# Allegro board pcb.brd
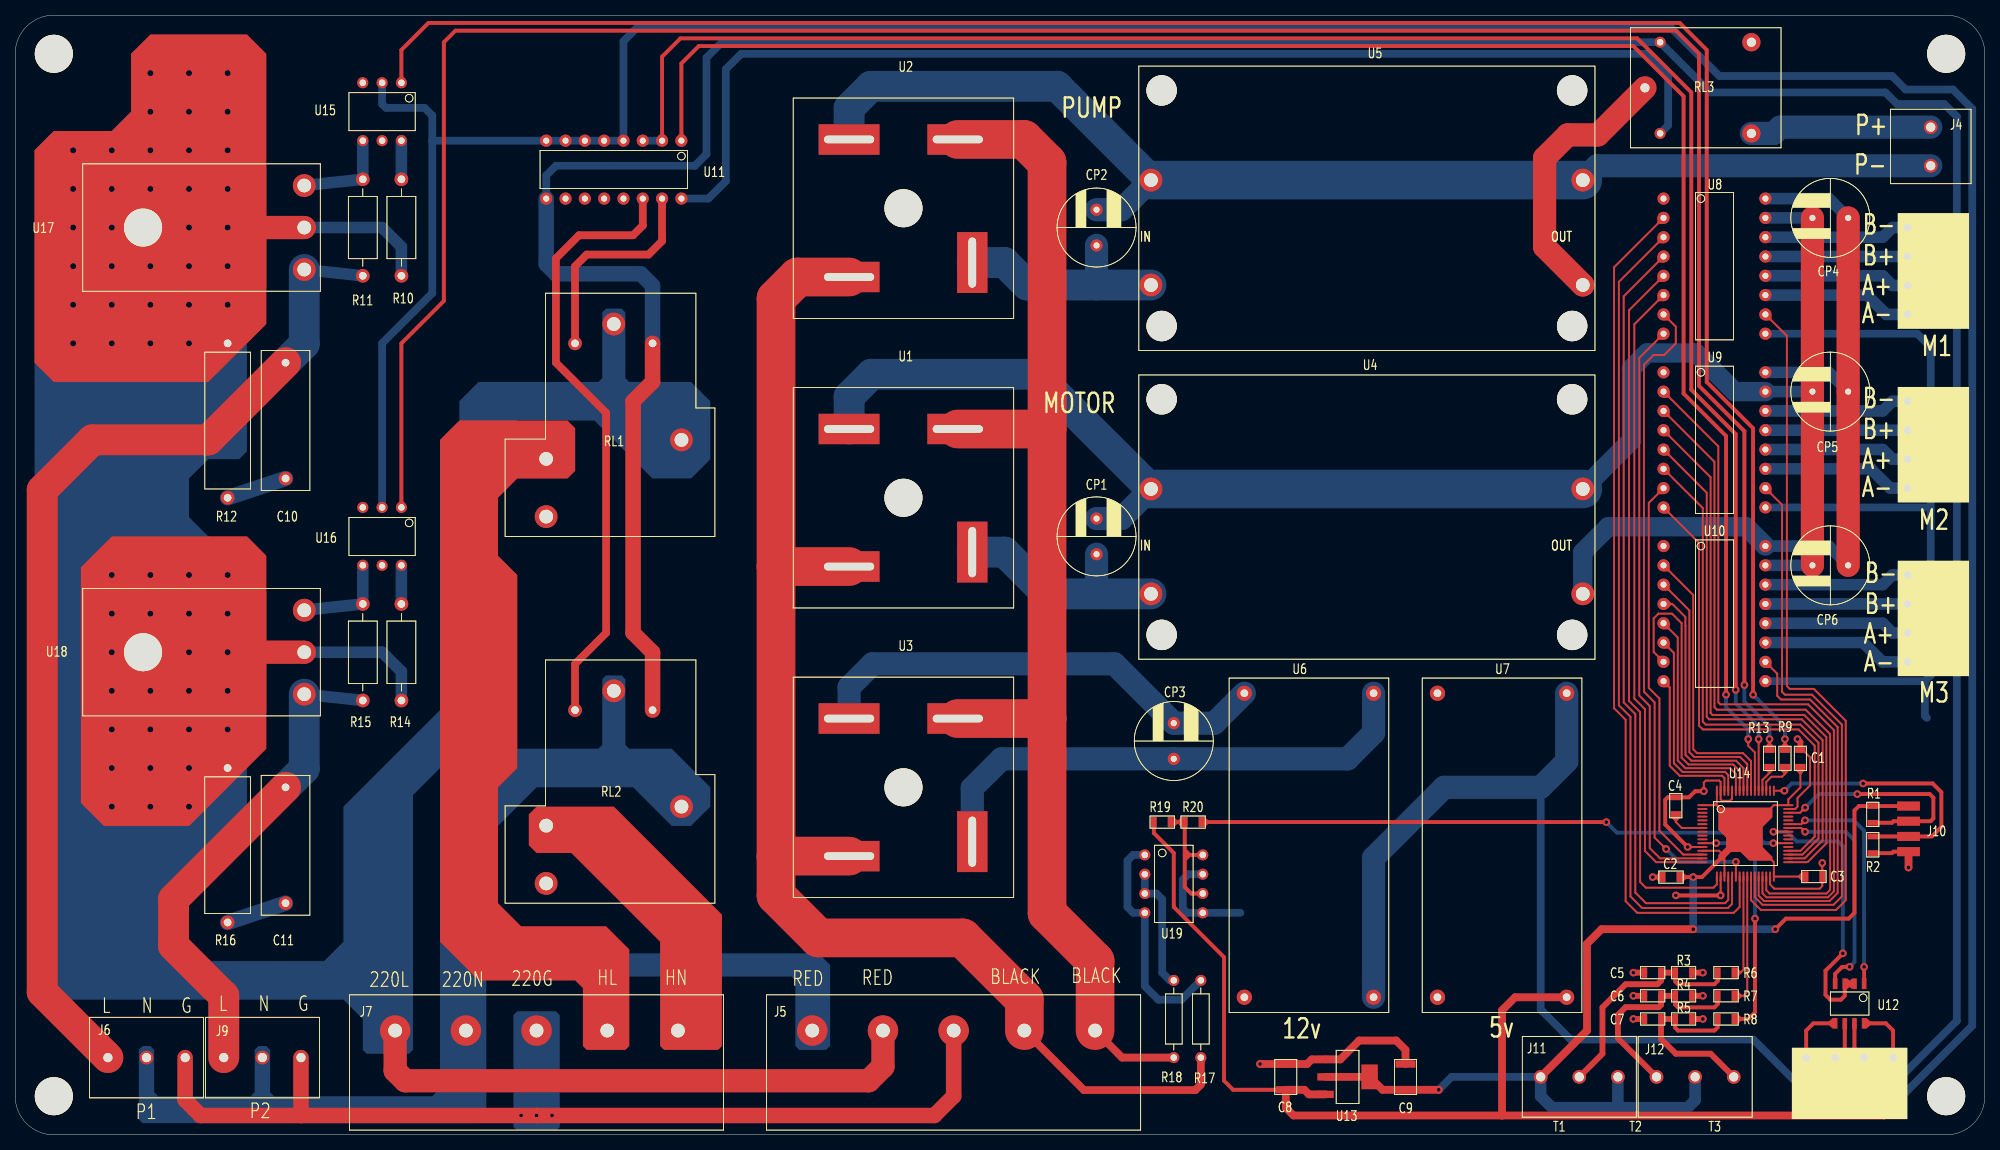
[diagram p0: board, top side]
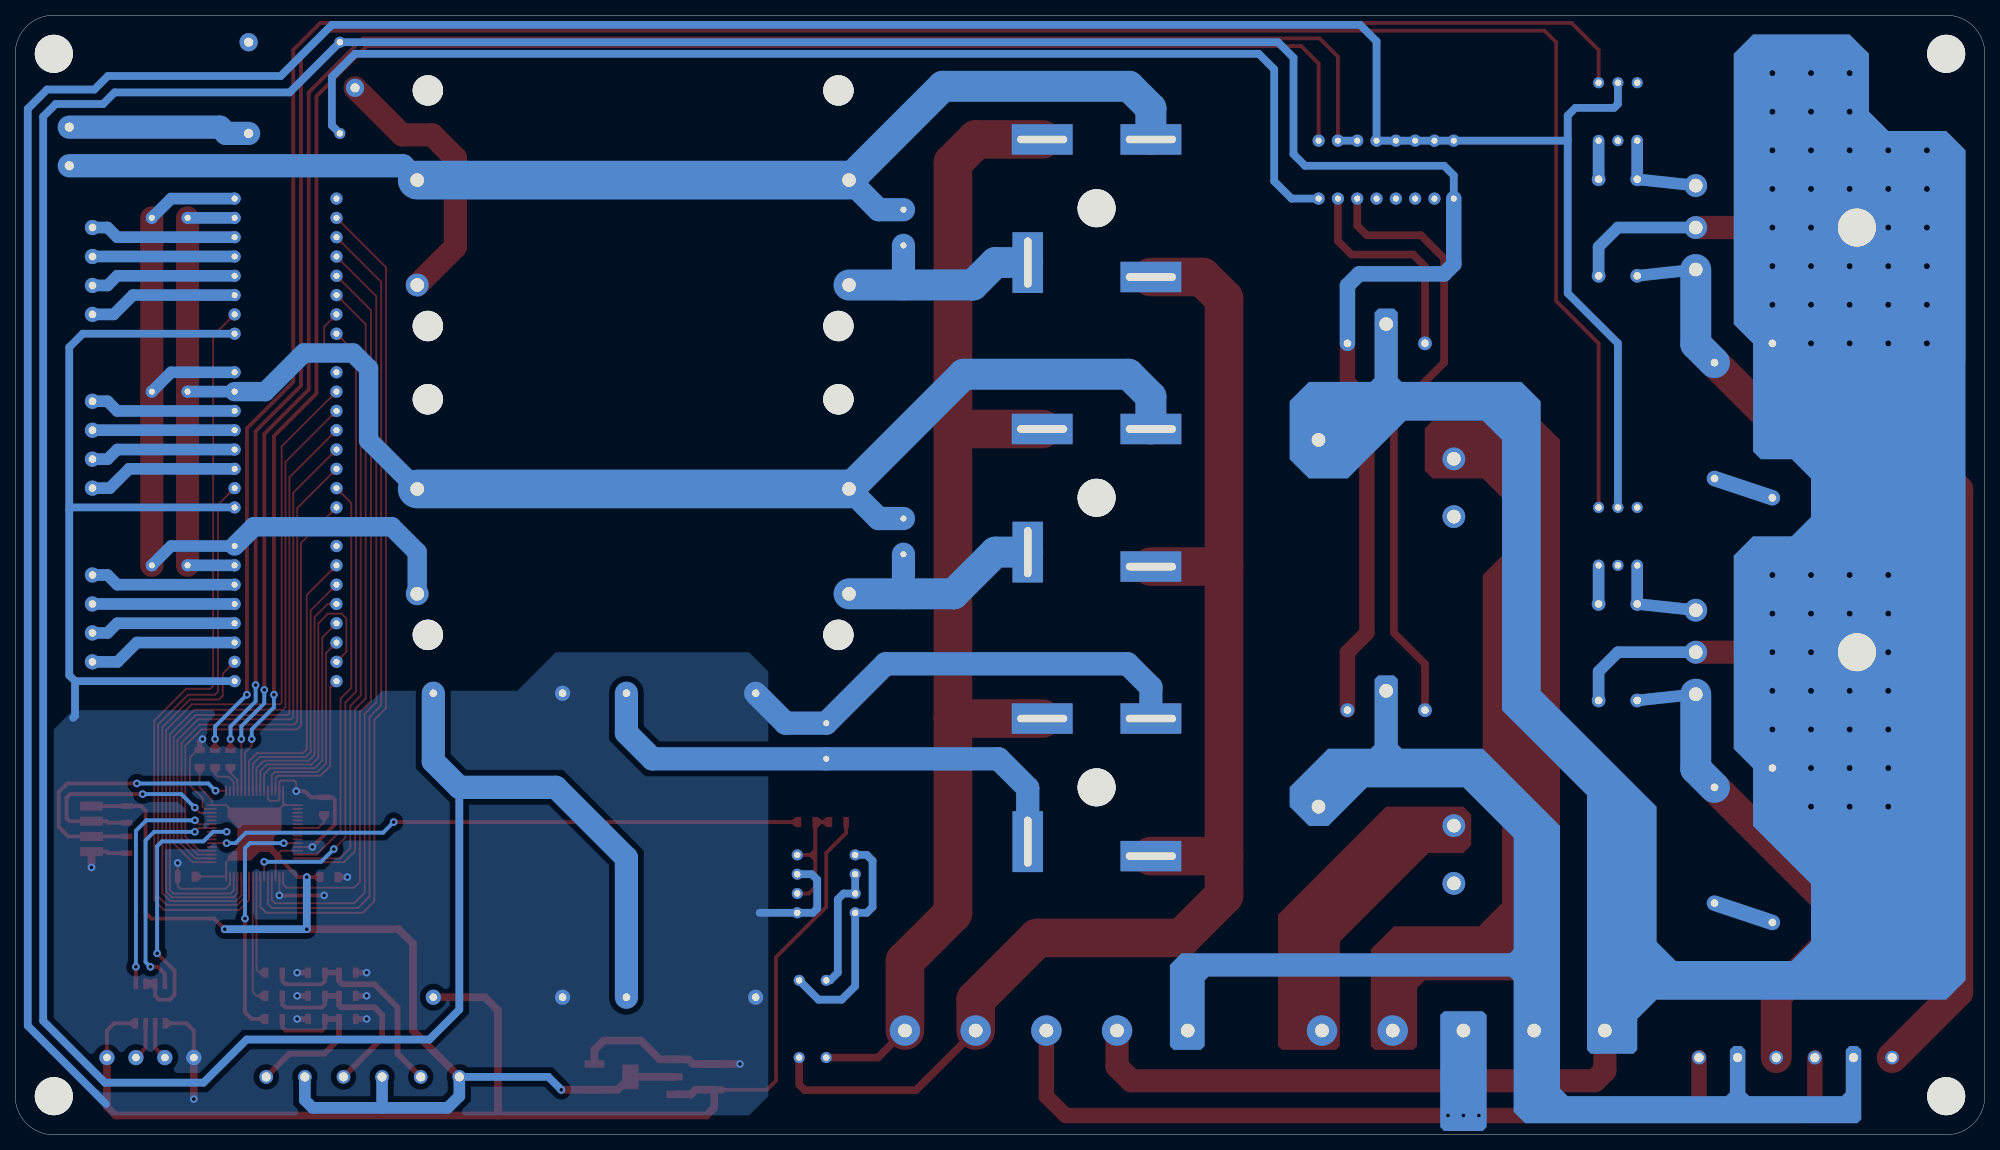
[diagram p1: board, bottom side, seen from below]

Outline 259.08 x 147.32 mm; copper layers: TOP, BOTTOM. Coordinates in mm from the lower left corner of the outline.
Outline path: 0,142.24 0,5.08 arc(1.49,1.49) 5.08,0 254,0 arc(257.59,1.49) 259.08,5.08 259.08,142.24 arc(257.59,145.83) 254,147.32 5.08,147.32 arc(1.49,145.83) 0,142.24

## Placement (name value [footprint] x y rotation side)
C1  100n  [C0805L]  234.82 49.53 270 top
C2  100n  [C0805L]  217.81 33.91 0 top
C3  100n  [C0805L]  236.6 33.98 0 top
C4  100n  [C0805L]  218.44 43.31 270 top
C5  100n  [C0805L]  215.39 21.34 0 top
C6  100n  [C0805L]  215.39 18.29 0 top
C7  100n  [C0805L]  215.39 15.24 0 top
C8  47u  [C1210L]  167.13 7.62 270 top
C9  47u  [C1210L]  182.88 7.62 270 top
C10  0.01u  [CAPAD1524]  35.56 93.98 270 top
C11  0.01u  [CAPAD1524]  35.56 38.1 270 top
CP1  470u/50v  [CAPPRD1020]  142.24 78.74 90 top
CP2  470u/50v  [CAPPRD1020]  142.24 119.38 90 top
CP3  470u/50v  [CAPPRD1020]  152.4 51.82 90 top
CP4  470u/50v  [CAPPRD1020]  238.76 120.65 180 top
CP5  470u/50v  [CAPPRD1020]  238.76 97.79 180 top
CP6  470u/50v  [CAPPRD1020]  238.76 74.93 180 top
J1  CON4  [CON381P_4W]  248.92 113.66 90 top
J2  CON4  [CON381P_4W]  248.92 90.8 90 top
J3  CON4  [CON381P_4W]  248.92 67.94 90 top
J4  CON2  [CON508P_2]  251.97 130.05 270 top
J5  CON5  [CON930P_5]  123.44 13.72 0 top
J6  CON3  [CON508P_3]  17.27 10.16 0 top
J7  CON5  [CON930P_5]  68.58 13.72 0 top
J8  485  [CON381P_4W]  241.3 10.16 0 top
J9  CON3  [CON508P_3]  32.51 10.16 0 top
J10  CON4  [PH200H_4]  249.05 40.26 270 top
J11  CON3  [CON508P_3]  205.74 7.62 0 top
J12  CON3  [CON508P_3]  220.98 7.62 0 top
NOREF  -  [unnamed]  5.08 142.24 0 top
NOREF#2  -  [unnamed]  254 5.08 0 top
NOREF#3  -  [unnamed]  5.08 5.08 0 top
NOREF#4  -  [unnamed]  254 142.24 0 top
R1  1002  [R0805L]  244.35 42.16 270 top
R2  1002  [R0805L]  244.35 38.16 90 top
R3  1002  [R0805L]  219.46 21.34 0 top
R4  1002  [R0805L]  219.46 18.29 0 top
R5  1002  [R0805L]  219.46 15.24 0 top
R6  101  [R0805L]  225.04 21.34 180 top
R7  101  [R0805L]  225.04 18.29 180 top
R8  101  [R0805L]  225.04 15.24 180 top
R9  301  [R0805L]  232.79 49.53 270 top
R10  100  [RESAD1270]  50.8 119.38 90 top
R11  10k  [RESAD1270]  45.72 119.38 90 top
R12  39  [RESAD2032]  27.94 93.98 270 top
R13  301  [R0805L]  230.76 49.53 270 top
R14  100  [RESAD1270]  50.8 63.5 90 top
R15  10k  [RESAD1270]  45.72 63.5 90 top
R16  39  [RESAD2032]  27.94 38.1 270 top
R17  5.6k  [RESAD1016]  155.96 15.24 90 top
R18  5.6k  [RESAD1016]  152.4 15.24 90 top
R19  472  [R0805L]  150.88 41.15 0 top
R20  102  [R0805L]  154.94 41.15 180 top
RL1  RELAY30  [RELAY30A]  78.74 104.14 180 top
RL2  RELAY30  [RELAY30A]  78.74 55.88 180 top
RL3  RELAY10  [RELAY10A]  214.38 137.76 0 top
U1  KBPC2510  [KBPCXX10]  116.84 83.82 0 top
U2  KBPC2510  [KBPCXX10]  116.84 121.92 0 top
U3  KBPC2510  [KBPCXX10]  116.84 45.72 0 top
U4  DC/DC/12  [DCDC60X38]  177.8 81.28 0 top
U5  DC/DC/12  [DCDC60X38]  177.8 121.92 0 top
U6  DC/DC/12  [DCDC44X21]  170.18 38.1 270 top
U7  DC/DC/12  [DCDC44X21]  195.58 38.1 270 top
U8  MDRV8825  [DIP254P1340_16]  223.52 114.3 0 top
U9  MDRV8825  [DIP254P1340_16]  223.52 91.44 0 top
U10  MDRV8825  [DIP254P1340_16]  223.52 68.58 0 top
U11  ULN2003  [DIP254P762_16]  78.74 127 270 top
U12  SN184  [SOIC8]  241.3 17.27 270 top
U13  LDO1117  [SOT223]  175.26 7.62 0 top
U14  STM32F103RX  [LQFP64]  227.58 39.62 0 top
U15  MOC3052  [DIP254P762_6]  48.26 134.62 270 top
U16  MOC3052  [DIP254P762_6]  48.26 78.74 270 top
U17  TRIAC  [BTA41]  33.02 119.38 90 top
U18  TRIAC  [BTA41]  33.02 63.5 90 top
U19  TLP521-2  [DIP254P762_8]  152.4 33.02 0 top

## Library data of the parts
C1-C11 = C
CP1-CP6 = CP
J1-J3 J8 J10 U4-U7 = CON4
J4 = CON2
J5 J7 = CON5
J6 J9 J11 J12 = CON3
R1-R20 = R
RL1 RL2 = RELAY3
RL3 = RELAY
U1-U3 = RECTBG
U8-U10 = MDRV8825
U11 = ULN2003
U12 = SN184
U13 = LDO1117
U14 = STM32F103RX
U15 U16 = MOC3083
U17 U18 = TRIAC-B
U19 = TLP521-2

## Footprints (pads in the part's own frame, mm; a bottom-side part is the same pattern mirrored in y, then rotated)
BTA41
  round 5.001 hole 5.001 unplated: (0,16.2)
  round 3 hole 1.801: 1(-5.524,-5.001) 2(0,-5.001) 3(5.524,-5.001)
  rect 15.999x24 smd: 4(0,11.999)
C0805L
  rect 0.749x1.349 smd: 1(-1.1,0) 2(1.1,0)
C1210L
  rect 0.95x2.601 smd: 1(-1.699,0) 2(1.699,0)
CAPAD1524
  round 1.801 hole 1.001: 1(-7.62,0) 2(7.62,0)
CAPPRD1020
  round 1.6 hole 0.8: 1(-2.349,0) 2(2.349,0)
CON381P_4W
  round 1.999 hole 1.001: 1(-5.715,0) 2(-1.905,0) 3(1.905,0) 4(5.715,0)
CON508P_2
  round 1.801 hole 1.199: 1(-2.54,0) 2(2.54,0)
CON508P_3
  round 1.801 hole 1.199: 1(-5.08,0) 2(0,0) 3(5.08,0)
CON930P_5
  round 4 hole 1.801: 1(-18.6,0) 2(-9.299,0) 3(0,0) 4(9.299,0) 5(18.6,0)
DCDC44X21
  round 1.999 hole 1.001: 1(-20,8.499) 2(-20,-8.499) 3(20,8.499) 4(20,-8.499)
DCDC60X38
  round 4 hole 4 unplated: (-27,15.499) (-27,-15.499) (27,15.499) (27,-15.499)
  round 3 hole 1.801: 1(-28.4,-10.099) 2(-28.4,3.701) 3(28.4,-10.099) 4(28.4,3.701)
DIP254P762_6
  round 1.45 hole 0.851: 1(-3.81,2.54) 2(-3.81,0) 3(-3.81,-2.54) 4(3.81,-2.54) 5(3.81,0) 6(3.81,2.54)
DIP254P762_8
  round 1.45 hole 0.851: 1(-3.81,3.81) 2(-3.81,1.27) 3(-3.81,-1.27) 4(-3.81,-3.81) 5(3.81,-3.81) 6(3.81,-1.27) 7(3.81,1.27) 8(3.81,3.81)
DIP254P762_16
  round 1.6 hole 0.8: 1(-3.81,8.89) 2(-3.81,6.35) 3(-3.81,3.81) 4(-3.81,1.27) 5(-3.81,-1.27) 6(-3.81,-3.81) 7(-3.81,-6.35) 8(-3.81,-8.89) 9(3.81,-8.89) 10(3.81,-6.35) 11(3.81,-3.81) 12(3.81,-1.27) 13(3.81,1.27) 14(3.81,3.81) 15(3.81,6.35) 16(3.81,8.89)
DIP254P1340_16
  round 1.6 hole 0.8: 1(-6.701,8.89) 2(-6.701,6.35) 3(-6.701,3.81) 4(-6.701,1.27) 5(-6.701,-1.27) 6(-6.701,-3.81) 7(-6.701,-6.35) 8(-6.701,-8.89) 9(6.701,-8.89) 10(6.701,-6.35) 11(6.701,-3.81) 12(6.701,-1.27) 13(6.701,1.27) 14(6.701,3.81) 15(6.701,6.35) 16(6.701,8.89)
KBPCXX10
  round 5.001 hole 5.001 unplated: (0,0)
  rect 4x8.001 hole 1.001x6.599: 1(9.05,-7.15)
  rect 8.001x4 hole 6.599x1.001: 2(-7.15,-9.05) 3(-7.15,9.05) 4(7.15,9.05)
LQFP64
  oval 1.349x0.249 smd: 1(-5.649,3.749) 2(-5.649,3.251) 3(-5.649,2.751) 4(-5.649,2.25) 5(-5.649,1.75) 6(-5.649,1.25) 7(-5.649,0.749) 8(-5.649,0.249) 9(-5.649,-0.249) 10(-5.649,-0.749) 11(-5.649,-1.25) 12(-5.649,-1.75) 13(-5.649,-2.25) 14(-5.649,-2.751) 15(-5.649,-3.251) 16(-5.649,-3.749) 33(5.649,-3.749) 34(5.649,-3.251) 35(5.649,-2.751) 36(5.649,-2.25) 37(5.649,-1.75) 38(5.649,-1.25) 39(5.649,-0.749) 40(5.649,-0.249) 41(5.649,0.249) 42(5.649,0.749) 43(5.649,1.25) 44(5.649,1.75) 45(5.649,2.25) 46(5.649,2.751) 47(5.649,3.251) 48(5.649,3.749)
  oval 0.249x1.349 smd: 17(-3.749,-5.649) 18(-3.251,-5.649) 19(-2.751,-5.649) 20(-2.25,-5.649) 21(-1.75,-5.649) 22(-1.25,-5.649) 23(-0.749,-5.649) 24(-0.249,-5.649) 25(0.249,-5.649) 26(0.749,-5.649) 27(1.25,-5.649) 28(1.75,-5.649) 29(2.25,-5.649) 30(2.751,-5.649) 31(3.251,-5.649) 32(3.749,-5.649) 49(3.749,5.649) 50(3.251,5.649) 51(2.751,5.649) 52(2.25,5.649) 53(1.75,5.649) 54(1.25,5.649) 55(0.749,5.649) 56(0.249,5.649) 57(-0.249,5.649) 58(-0.749,5.649) 59(-1.25,5.649) 60(-1.75,5.649) 61(-2.25,5.649) 62(-2.751,5.649) 63(-3.251,5.649) 64(-3.749,5.649)
PH200H_4
  rect 1.199x3 smd: 1(-3,0) 2(-1.001,0) 3(1.001,0) 4(3,0)
R0805L
  rect 0.749x1.349 smd: 1(-1.1,0) 2(1.1,0)
RELAY10A
  round 1.45 hole 0.851: 1(1.999,5.999) 2(1.999,-5.999)
  round 2.4 hole 1.199: 3(0,0) 4(14,-5.999) 5(14,5.999)
RELAY30A
  round 1.801 hole 1.001: 1(-5.1,0) 2(5.1,0)
  round 3 hole 1.801: 3(-8.9,12.7) 4(8.9,15.199) 5(8.9,22.799) 6(0,-2.54)
RESAD1016
  round 1.45 hole 0.851: 1(-5.08,0) 2(5.08,0)
RESAD1270
  round 1.801 hole 1.001: 1(-6.35,0) 2(6.35,0)
RESAD2032
  round 1.801 hole 1.001: 1(-10.16,0) 2(10.16,0)
SOIC8
  rect 1.4x0.599 smd: 1(-2.601,1.905) 2(-2.601,0.635) 3(-2.601,-0.635) 4(-2.601,-1.905) 5(2.601,-1.905) 6(2.601,-0.635) 7(2.601,0.635) 8(2.601,1.905)
SOT223
  rect 2.149x0.95 smd: 1(-2.901,2.301) 2(-2.901,0) 3(-2.901,-2.301)
  rect 2.149x3.251 smd: 4(2.901,0)
unnamed
  round 5.001 hole 5.001 unplated: (0,0)

## Nets
3V3: C1.2 C2.2 C3.1 C9.2 J10.1 J11.1 J11.3 J12.2 R1.1 U13.2(VO) U13.4(VOP) U14.1(VBAT) U14.13(VDDA) U14.19(VDD_4) U14.32(VDD_1) U14.48(VDD_2) U14.64(VDD_3)
5V: C8.2 J8.4 R19.1 U7.3 U12.8(VCC) U13.3(VI)
12V: RL1.1 RL2.1 RL3.1 U6.3 U7.1 U11.9(COMM)
27V: CP3.1 U3.1(+) U6.1
GND: C1.1 C2.1 C3.2 C4.1 C5.1 C6.1 C7.1 C8.1 C9.1 CP3.2 J8.1 J10.4 R2.1 R3.2 R4.2 R5.2 U3.3(-) U6.2 U6.4 U7.2 U7.4 U8.9(GND) U9.9(GND) U10.9(GND) U11.4(IN4) U11.5(IN5) U11.6(IN6) U11.7(IN7) U11.8(GND) U12.5(GND) U13.1(GND) U14.12(VSSA) U14.18(VSS_4) U14.31(VSS_1) U14.47(VSS_2) U14.60(BOOT0) U14.63(VSS_3) U15.2 U16.2 U19.5(2E) U19.7(1E)
P24V: RL3.3 U5.3
P27V: CP2.1 U2.1(+) U5.1
PGND: CP2.2 J4.2 U2.3(-) U5.2 U5.4
485A: J8.2 U12.6(A)
485B: J8.3 U12.7(B)
485DE: U12.2(R\E\) U12.3(DE) U14.41(PA8/MCO/TIM1_CH1)
AC24L: J5.4 R17.1 U1.2(AC1) U2.2(AC1) U3.2(AC1)
AC24N: J5.5 R18.1 U1.4(AC2) U2.4(AC2) U3.4(AC2)
AC220G: J5.3 J6.3 J7.3 J9.3
AC220L: J5.2 J7.1 R10.1 R12.1 R14.1 R16.1 RL1.3 RL1.6 U17.2 U17.4(TAB) U18.2 U18.4(TAB)
AC220N: J5.1 J6.2 J7.2 J9.2 RL2.3 RL2.6
AT1: R6.1 U14.24(PC4/ADC1_IN14)
AT2: R7.1 U14.25(PC5/ADC1_IN15)
AT3: R8.1 U14.11(PC3/ADC1_IN13)
HEATC: U11.2(IN2) U11.3(IN3) U14.53(PC12)
HEATL: J7.4 RL1.4
HEATN: J7.5 RL2.4
M1A1: J1.2 U8.12(A1)
M1A2: J1.1 U8.11(A2)
M1B1: J1.3 U8.13(B1)
M1B2: J1.4 U8.14(B2)
M1DIR: U8.8(DIR) U14.15(PA1/ADC1_IN1)
M1M0: U8.2(M0) U14.23(PA7/SPI1_MOSI/ADC1_IN7)
M1M1: U8.3(M1) U14.21(PA5/SPI1_SCK/ADC1_IN5)
M1M2: U8.4(M2) U14.20(PA4/SPI1_NSS/ADC1_IN4)
M1NFLT: U8.10(NFAULT) U14.26(PB0/ADC1_IN8)
M1NRST: U8.5(NRST) U14.17(PA3/USART2_RX/ADC1_IN3)
M1NSLP: U8.6(NSLEEP) U14.16(PA2/USART2_TX/ADC1_IN2)
M1STEP: U8.7(STEP) U14.22(PA6/SPI1_MISO/ADC1_IN6)
M2A1: J2.2 U9.12(A1)
M2A2: J2.1 U9.11(A2)
M2B1: J2.3 U9.13(B1)
M2B2: J2.4 U9.14(B2)
M2DIR: U9.8(DIR) U14.36(PB15/TIM1_CH3N)
M2M0: U9.2(M0) U14.29(PB10)
M2M1: U9.3(M1) U14.30(PB11)
M2M2: U9.4(M2) U14.33(PB12/TIM1_BKIN)
M2NFLT: U9.10(NFAULT) U14.27(PB1/ADC1_IN9)
M2NRST: U9.5(NRST) U14.34(PB13/TIM1_CH1N)
M2NSLP: U9.6(NSLEEP) U14.35(PB14/TIM1_CH2N)
M2STEP: U9.7(STEP) U14.14(PA0/WKUP/ADC1_IN0)
M3A1: J3.2 U10.12(A1)
M3A2: J3.1 U10.11(A2)
M3B1: J3.3 U10.13(B1)
M3B2: J3.4 U10.14(B2)
M3DIR: U10.8(DIR) U14.62(PB9)
M3M0: U10.2(M0) U14.55(PB3)
M3M1: U10.3(M1) U14.56(PB4)
M3M2: U10.4(M2) U14.57(PB5/I2C1_SMBAI)
M3NFLT: U10.10(NFAULT) U14.28(PB2)
M3NRST: U10.5(NRST) U14.59(PB7/I2C1_SDA)
M3NSLP: U10.6(NSLEEP) U14.61(PB8)
M3STEP: U10.7(STEP) U14.58(PB6/I2C1_SCL)
M24V: CP4.1 CP5.1 CP6.1 U4.3 U8.16(MVCC) U9.16(MVCC) U10.16(MVCC)
M27V: CP1.1 U1.1(+) U4.1
MGND: CP1.2 CP4.2 CP5.2 CP6.2 U1.3(-) U4.2 U4.4 U8.15(MGND) U9.15(MGND) U10.15(MGND)
P1L: C10.1 J6.1 R11.1 U17.1
P2L: C11.1 J9.1 R15.1 U18.1
PO24V: J4.1 RL3.4
PUMP: U11.1(IN1) U14.54(PD2)
PUMP1: R9.2 U14.51(PC10)
PUMP2: R13.2 U14.52(PC11)
RXD1: U12.1(R) U14.43(PA10/USART1_RX/TIM1_CH3)
SWCLK: J10.3 R2.2 U14.49(PA14/SWCLK)
SWDIO: J10.2 R1.2 U14.46(PA13/SWDIO)
T1: C5.2 J11.2 R3.1 R6.2
T2: C6.2 J12.1 R4.1 R7.2
T3: C7.2 J12.3 R5.1 R8.2
TXD1: U12.4(D) U14.42(PA9/USART1_TX/TIM1_CH2)
UHEATL: RL1.2 U11.15(OUT2)
UHEATN: RL2.2 U11.14(OUT3)
UPUMP: RL3.2 U11.16(OUT1)
ZERO: R20.1 U14.38(PC7)
N931520: C4.2 U14.7(NRST)
N946293: R11.2 U15.4 U17.3
N946361: R10.2 U15.6
N946401: C10.2 R12.2
N946461: R9.1 U15.1
N947130: R17.2 U19.1(1P) U19.4(2N)
N947134: R18.2 U19.2(1N) U19.3(2P)
N947246: R19.2 R20.2 U19.6(2C) U19.8(1C)
N947751: R15.2 U16.4 U18.3
N947803: R14.2 U16.6
N947859: C11.2 R16.2
N947919: R13.1 U16.1

Pads without a net: RL1 5; RL2 5; RL3 5; U8 1; U9 1; U10 1; U11 10 11 12 13; U14 2 3 4 5 6 8 9 10 37 39 40 44 45 50; U15 3 5; U16 3 5

## Via types
v1: diameter 1.001, hole 0.5, TOP to BOTTOM, 47 vias
v2: diameter 1.6, hole 0.8, TOP to BOTTOM, 59 vias

## Routing (per net, layer and track width the routed paths; a pad name or vN(x,y) marks a point on that pad's centre or on a via; arc(x,y) is an arc through that point)
3V3: length 178.1
  TOP w0.254: C3.1 U14.32 231.33,35.87 230.63,36.58 ; 223.83,43.37 224.54,42.67 ; 223.83,43.37 U14.64 ; 223.83,43.37 U14.1 ; U14.13 224.12,37.37 224.54,36.96 ; 230.38,42.42 231.33,43.37 U14.48 233.23,44.13 234.82,45.72 C1.2 ; U14.19 224.83,36.58
  TOP w0.508: C2.2 v1(220.73,33.91) 221.87,33.91 224.41,36.45 ; v1(231.52,27.05) 232.92,28.45 241.17,28.45 241.94,29.21 241.94,42.67 242.52,43.26 R1.1 J10.1
  TOP w1.016: J11.1 206.76,13.72 206.76,25.15 208.66,27.05 v1(220.73,27.05) ; v1(187.25,5.92) C9.2 179.86,5.92 U13.4 U13.2
  BOTTOM w1.016: v1(231.52,27.05) v1(220.73,27.05) v1(220.73,33.91) ; v1(187.25,5.92) 188.95,7.62 J11.1
  BOTTOM w1.524: J11.3 210.82,3.56 ; 210.82,3.56 202.18,3.56 200.66,5.08 J11.1 ; 210.82,3.56 219.96,3.56 220.98,4.57 J12.2
5V: length 172.4
  TOP w0.508: C8.2 160.2,5.92 159,7.11 159,23.37 152.4,29.97 152.4,37.08 149.78,39.71 R19.1 ; U12.8 246.06,14.67 247.01,13.72 J8.4
  TOP w1.016: 195.58,2.54 245.87,2.54 247.01,3.68 J8.4 ; 195.58,2.54 168.15,2.54 167.13,3.56 C8.2 169.58,5.92 170.18,5.32 U13.3 ; 195.58,2.54 195.58,16.38 197.3,18.1 U7.3
12V: length 557.4
  TOP w2.032: RL1.1 83.84,99.08 81.28,96.52 81.28,66.04 83.84,63.48 RL2.1
  BOTTOM w1.016: 200.66,45.72 200.66,16.47 204.6,12.54 228.64,12.54 234.31,6.86 247.27,6.86 255.4,14.99 255.4,133.99 253.75,135.64 247.52,135.64 246,137.16 222.98,137.16 RL3.1 92.96,143.76 90.93,141.73 90.93,129.03 89.41,127.51 71.12,127.51 69.85,126.24 U11.9
  BOTTOM w2.032: U11.9 69.85,114.55 71.12,113.28 82.3,113.28 83.84,111.74 RL1.1
  BOTTOM w3.048: U6.3 178.68,36.44 187.96,45.72 200.66,45.72 204.08,49.14 U7.1
27V: length 68.1
  BOTTOM w3.048: U3.1 125.89,45.63 129.73,49.47 CP3.1 175.26,49.47 178.68,52.89 U6.1
GND: length 719.7
  TOP w0.254: U14.12 v1(219.99,37.87) ; U14.47 234.14,42.88 234.44,43.18 234.44,44.32 236.09,45.97 236.09,49.66 235.12,50.63 C1.1 ; U14.60 225.83,44.24 225.81,44.21 225.81,44.2 225.55,43.94 224.54,43.94 224.33,44.15 U14.63 224.33,46.43 224.15,46.61 222.38,46.61 222.12,46.35 v1(222.12,45.21) ; v1(237.7,35.77) C3.2 237.7,32.72 237.36,32.38 231.39,32.38 230.84,32.94 U14.31 ; v1(224.33,31.5) U14.18
  TOP w0.508: J10.4 247.06,37.26 246.86,37.06 R2.1 ; v1(219.99,37.87) 217.04,40.82 217.04,44.07 217.38,44.41 C4.1 220.17,44.41 220.98,45.21 v1(222.12,45.21) ; J8.1 235.59,13.72 236.54,14.67 U12.5 ; C2.1 v1(215.39,33.91) ; v1(218.44,31.5) v1(224.33,31.5)
  TOP w0.762: C6.1 v1(212.85,18.29) ; R3.2 v1(222,21.34) ; C5.1 v1(212.85,21.34) ; R5.2 v1(222,15.24) ; R4.2 v1(222,18.29) ; v1(234.44,52.07) 234.82,51.69 C1.1 ; C7.1 v1(212.85,15.24)
  TOP w1.016: C9.1 182.88,11.18 181.65,12.41 176.78,12.41 174.3,9.92 U13.1 170.55,9.92 169.95,9.32 C8.1 v1(163.75,9.32) ; J10.4 v1(249.05,35.18) ; J8.1 v1(235.59,4.7)
  BOTTOM w1.016: U10.9 251.21,59.69 ; 251.21,59.69 251.21,55.12 251.46,54.86 ; 251.21,59.69 251.97,60.45 251.97,82.3 ; 251.97,82.3 251.97,103.63 250.19,105.41 U8.9 ; 251.97,82.3 251.71,82.55 U9.9 ; U15.2 48.26,135.64 48.77,135.13 53.85,135.13 54.86,134.11 54.86,130.81 ; U16.2 48.26,104.14 54.86,110.74 54.86,130.81 ; U19.7 154.31,34.29 153.58,33.57 153.58,29.8 154.18,29.21 U19.5 161.16,29.21 ; 54.86,130.81 U11.8 U11.7 U11.6 U11.5 U11.4 80.01,143.89 82.17,146.05 217.42,146.05 224.16,139.32 246.89,139.32 248.67,137.54 254.89,137.54 257.43,135 257.43,14.35 247.14,4.06
  BOTTOM w3.048: U6.2 157.75,54.17 CP3.2 144.59,61.98 112.78,61.98 109.69,58.89 U3.3
P24V: length 35.8
  TOP w3.048: RL3.3 208.18,131.57 204.22,131.57 201.17,128.53 201.17,116.85 U5.3
P27V: length 29.9
  BOTTOM w3.048: CP2.1 142.24,111.82
  BOTTOM w4.064: U5.1 133.1,111.82 130.15,114.77 U2.1
PGND: length 162.3
  BOTTOM w3.048: CP2.2 145.51,121.73 U5.2 ; U5.4 208.09,127.51 J4.2
  BOTTOM w4.064: U2.3 109.69,135.09 112.57,137.97 137.06,137.97 U5.2
  BOTTOM w5.08: U5.2 U5.4
485A: length 5
  TOP w0.508: U12.6 240.66,11.43 J8.2
485B: length 5
  TOP w0.508: 241.94,14.67 241.94,11.43 J8.3
485DE: length 38.3
  TOP w0.254: U14.41 v1(231.27,39.87)
  TOP w0.508: v1(240.41,23.88) 238.12,21.59 238.12,18.41 238.76,17.78 240.16,17.78 240.66,18.29 U12.3 241.94,19.87
  BOTTOM w0.508: v1(231.27,39.87) 233.05,39.87 234.31,38.61 239.78,38.61 240.41,37.97 v1(240.41,23.88)
AC24L: length 181.3
  TOP w1.016: R17.1 155.96,6.6 155.23,5.88 140.58,5.88 J5.4
  TOP w5.08: 100.08,74.77 100.08,36.67 ; 100.08,74.77 U1.2 ; 100.08,74.77 100.08,110.03 102.92,112.87 U2.2 ; 100.08,36.67 U3.2 ; 100.08,36.67 100.08,31.5 105.66,25.91 124.61,25.91 132.74,17.78 J5.4
AC24N: length 165.1
  TOP w1.016: J5.5 145.6,10.16 R18.1
  TOP w5.08: 135.73,92.87 135.73,54.77 ; 135.73,92.87 135.73,127.92 132.68,130.97 U2.4 ; 135.73,92.87 U1.4 ; 135.73,54.77 U3.4 ; 135.73,54.77 135.73,29.17 142.04,22.86 J5.5
AC220G: length 124.8
  TOP w2.032: 37.59,2.54 v1(66.55,2.54) v1(68.58,2.54) v1(70.61,2.54) 120.9,2.54 123.44,5.08 J5.3 ; 37.59,2.54 J9.3 ; 37.59,2.54 24.38,2.54 22.35,4.57 J6.3
AC220L: length 144.8
  TOP w3.048: J7.1 49.98,8.44 51.31,7.11 112.27,7.11 114.15,8.99 J5.2 ; U18.2 v2(27.94,63.5) v2(22.86,63.5) U18.4 ; U17.2 v2(27.94,119.38) v2(22.86,119.38) U17.4
  BOTTOM w1.524: R14.1 50.8,60.96 48.26,63.5 U18.2 ; U17.2 48.26,119.38 50.8,116.84 R10.1
  vias: v2(7.62,129.54) v2(7.62,124.46) v2(7.62,119.38) v2(7.62,114.3) v2(7.62,109.22) v2(7.62,104.14) v2(12.7,129.54) v2(12.7,124.46) v2(12.7,119.38) v2(12.7,114.3) v2(12.7,109.22) v2(12.7,104.14) v2(12.7,73.66) v2(12.7,68.58) v2(12.7,63.5) v2(12.7,58.42) v2(12.7,53.34) v2(12.7,48.26) v2(12.7,43.18) v2(17.78,139.7) v2(17.78,134.62) v2(17.78,129.54) v2(17.78,124.46) v2(17.78,114.3) v2(17.78,109.22) v2(17.78,104.14) v2(17.78,73.66) v2(17.78,68.58) v2(17.78,58.42) v2(17.78,53.34) v2(17.78,48.26) v2(17.78,43.18) v2(22.86,139.7) v2(22.86,134.62) v2(22.86,129.54) v2(22.86,124.46) v2(22.86,114.3) v2(22.86,109.22) v2(22.86,104.14) v2(22.86,73.66) v2(22.86,68.58) v2(22.86,58.42) v2(22.86,53.34) v2(22.86,48.26) v2(22.86,43.18) v2(27.94,139.7) v2(27.94,134.62) v2(27.94,129.54) v2(27.94,124.46) v2(27.94,114.3) v2(27.94,109.22) v2(27.94,73.66) v2(27.94,68.58) v2(27.94,58.42) v2(27.94,53.34)
AT1: length 13.6
  TOP w0.254: U14.24 227.34,21.72 226.95,21.34 R6.1
AT2: length 17.1
  TOP w0.254: U14.25 227.83,18.79 227.33,18.29 R7.1
AT3: length 31.9
  TOP w0.254: U14.11 v1(223.75,38.37)
  TOP w0.508: R8.1 227.96,15.24 228.85,16.13 v1(228.85,28.45)
  BOTTOM w0.508: v1(223.75,38.37) 228.2,38.37 228.85,37.72 v1(228.85,28.45)
HEATC: length 248.5
  TOP w0.254: U14.53 v1(229.33,52.07)
  TOP w0.508: v1(226.31,58.55) 226.31,92.2 220.47,98.04 220.47,137.16 213.36,144.27 87.5,144.27 85.09,141.86 U11.2
  BOTTOM w0.508: v1(229.33,52.07) 229.33,53.75 226.31,56.77 v1(226.31,58.55)
  BOTTOM w1.016: U11.3 U11.2
M1A1: length 19.2
  BOTTOM w1.524: U8.12 245.66,113.03 246.93,111.76 J1.2
M1A2: length 19.8
  BOTTOM w1.524: U8.11 243.59,110.49 246.13,107.95 J1.1
M1B1: length 18.7
  BOTTOM w1.524: U8.13 J1.3
M1B2: length 19.2
  BOTTOM w1.524: U8.14 245.66,118.11 246.93,119.38 J1.4
M1DIR: length 77.1
  TOP w0.254: U14.15 216.36,36.37 215.01,37.72 215.01,56.41 213.63,57.8 213.63,102.22 U8.8
M1M0: length 113.2
  TOP w0.254: U8.2 210.31,114.14 210.31,56.13 211.84,54.61 211.84,30.73 213.36,29.21 226.06,29.21 226.83,29.98 U14.23
M1M1: length 107.6
  TOP w0.254: U8.3 210.95,112.24 210.95,56.52 212.47,54.99 212.47,31.37 214,29.84 225.3,29.84 225.83,30.38 U14.21
M1M2: length 102.6
  TOP w0.254: U8.4 211.58,110.33 211.58,56.9 213.11,55.37 213.11,31.88 214.5,30.48 224.92,30.48 225.33,30.9 U14.20
M1NFLT: length 99.9
  TOP w0.254: U8.10 233.04,105.13 233.04,59.05 233.43,58.67 236.6,58.67 240.79,54.48 240.79,30.86 239.52,29.59 229.62,29.59 228.33,30.87 U14.26
M1NRST: length 93.9
  TOP w0.254: U14.17 223.83,32.95 223.39,32.51 214.5,32.51 213.74,33.27 213.74,55.63 212.28,57.09 212.28,108.49 U8.5
M1NSLP: length 83.5
  TOP w0.254: U14.16 215.84,35.87 214.38,37.34 214.38,56.01 212.98,57.4 212.98,106.65 U8.6
M1STEP: length 86.6
  TOP w0.254: U8.7 218.44,106.33 218.44,104.14 216.92,102.62 215.52,102.62 214.25,101.35 214.25,58.29 215.65,56.9 215.65,39.12 v1(217.17,37.59) ; v1(226.33,35.92) U14.22
  BOTTOM w0.508: v1(226.33,35.92) 218.84,35.92 v1(217.17,37.59)
M2A1: length 19.2
  BOTTOM w1.524: U9.12 245.66,90.17 246.93,88.9 J2.2
M2A2: length 19.8
  BOTTOM w1.524: J2.1 246.63,85.09 244.09,87.63 U9.11
M2B1: length 18.7
  BOTTOM w1.524: U9.13 J2.3
M2B2: length 19.2
  BOTTOM w1.524: J2.4 246.93,96.52 245.66,95.25 U9.14
M2DIR: length 63.2
  TOP w0.254: U9.8 221.49,77.88 221.49,53.85 222,53.34 234.57,53.34 236.71,51.2 236.71,39.24 234.84,37.37 U14.36
M2M0: length 93.9
  TOP w0.254: U9.2 224.03,90.58 224.03,56.9 224.28,56.64 235.84,56.64 239.23,53.25 239.23,32.03 238.46,31.25 230.37,31.25 229.83,31.79 U14.29
M2M1: length 89.5
  TOP w0.254: U9.3 223.52,88.55 223.52,56.26 223.84,55.94 235.51,55.94 238.73,52.72 238.73,32.23 238.25,31.75 230.76,31.75 230.33,32.17 U14.30
M2M2: length 76.3
  TOP w0.254: U14.33 235.76,35.87 238.24,38.35 238.24,52.34 235.33,55.24 223.27,55.24 223.01,55.5 223.01,86.52 U9.4
M2NFLT: length 75
  TOP w0.254: U9.10 232.41,82.9 232.41,58.29 232.79,57.91 236.35,57.91 240.28,53.97 240.28,31.37 239.18,30.26 229.83,30.26 228.83,31.26 U14.27
M2NRST: length 72.7
  TOP w0.254: U14.34 235.38,36.37 237.74,38.73 237.74,51.93 235.01,54.67 222.83,54.67 222.5,54.99 222.5,84.49 U9.5
M2NSLP: length 69.2
  TOP w0.254: U14.35 235.09,36.87 237.2,38.99 237.2,51.6 234.82,53.97 222.38,53.97 221.98,54.37 221.98,82.47 U9.6
M2STEP: length 53.4
  TOP w0.254: U9.7 214.88,83.15 214.88,58.8 216.28,57.4 216.28,40 219.41,36.87 U14.14
M3A1: length 19.2
  BOTTOM w1.524: U10.12 245.66,67.31 246.93,66.04 J3.2
M3A2: length 19.8
  BOTTOM w1.524: U10.11 243.08,64.77 245.62,62.23 J3.1
M3B1: length 18.7
  BOTTOM w1.524: U10.13 J3.3
M3B2: length 19.2
  BOTTOM w1.524: J3.4 246.93,73.66 245.66,72.39 U10.14
M3DIR: length 21
  TOP w0.254: U14.62 224.83,46.95 224.54,47.24 218.95,47.24 217.64,48.55 217.64,58.87 U10.8
M3M0: length 38
  TOP w0.254: U10.2 220.73,71.02 220.73,50.72 221.23,50.22 227.28,50.22 228.33,49.16 U14.55
M3M1: length 35.2
  TOP w0.254: U14.56 227.83,48.77 226.89,49.72 220.85,49.72 220.22,50.36 220.22,68.99 U10.3
M3M2: length 33.1
  TOP w0.254: U10.4 217.98,69.85 219.7,68.13 219.7,66.97 219.71,66.96 219.71,49.99 220.47,49.23 226.36,49.23 227.34,48.25 U14.57
M3NFLT: length 50.2
  TOP w0.254: U10.10 231.78,60.68 231.78,57.77 232.27,57.28 236.09,57.28 239.73,53.64 239.73,31.82 238.66,30.76 230.04,30.76 229.33,31.46 U14.28
M3NRST: length 29.4
  TOP w0.254: U10.5 218.69,65.44 218.69,49.25 219.71,48.23 225.58,48.23 226.33,47.48 U14.59
M3NSLP: length 26.3
  TOP w0.254: U14.61 225.33,47.34 224.93,47.74 219.33,47.74 218.19,48.88 218.19,63.4 U10.6
M3STEP: length 39.4
  TOP w0.254: U14.58 226.83,47.87 225.97,48.73 220.09,48.73 219.2,49.62 219.2,67.31 217.93,68.58 216.15,68.58 215.52,67.94 215.52,63.53 U10.7
M24V: length 113.5
  TOP w3.048: CP6.1 CP5.1 CP4.1
  BOTTOM w1.524: CP6.1 238.57,77.47 U10.16 ; U9.16 238.57,100.33 CP5.1 ; CP4.1 238.57,123.19 U8.16
  BOTTOM w2.54: U10.16 227.68,80.01 209.55,80.01 206.2,76.66 U4.3
M27V: length 31
  BOTTOM w3.048: CP1.1 142.24,71.18
  BOTTOM w4.064: U4.1 135.64,71.18 130.15,76.67 U1.1
MGND: length 220.4
  TOP w3.048: CP4.2 CP5.2 CP6.2
  BOTTOM w1.524: U9.15 CP5.2 ; U10.15 CP6.2 ; U8.15 CP4.2
  BOTTOM w2.54: U9.15 226.19,97.79 221.11,102.87 214.63,102.87 212.6,100.84 212.6,91.38 U4.4
  BOTTOM w3.048: U4.2 145.51,81.09 CP1.2
  BOTTOM w4.064: U1.3 109.69,97.13 112.63,100.08 134.31,100.08 U4.2
  BOTTOM w5.08: U4.2 U4.4
P1L: length 138.2
  TOP w4.064: J6.1 3.56,18.8 3.56,84.84 10.16,91.44 25.4,91.44 C10.1
  BOTTOM w1.524: U17.1 R11.1
  BOTTOM w4.064: U17.1 38.02,104.06 C10.1
P2L: length 65.4
  TOP w4.064: C11.1 20.83,30.99 20.83,24.89 27.43,18.29 J9.1
  BOTTOM w1.524: U18.1 R15.1
  BOTTOM w4.064: C11.1 38.02,48.18 U18.1
PO24V: length 23.9
  BOTTOM w3.048: RL3.4 231.33,131.77 232.16,132.59 J4.1
PUMP: length 240.9
  TOP w0.254: v1(227.96,52.07) 227.96,51.18 228.83,50.31 U14.54
  TOP w0.508: U11.1 87.63,140.97 89.92,143.26 212.85,143.26 219.46,136.65 219.46,97.54 225.04,91.95 v1(225.04,57.91)
  BOTTOM w0.508: v1(227.96,52.07) 227.96,53.34 225.04,56.26 v1(225.04,57.91)
PUMP1: length 5
  TOP w0.254: U14.51 230.33,46.44 231.01,47.12 232.41,47.12 232.79,47.5 R9.2
PUMP2: length 3.5
  TOP w0.254: U14.52 229.83,46.7 230.76,47.62 R13.2
RXD1: length 30.9
  TOP w0.254: v1(235.44,41.38) 234.93,40.87 U14.43
  TOP w0.508: U12.1 v1(243.2,22.1)
  BOTTOM w0.508: v1(235.44,41.38) 241.83,41.38 243.2,40 v1(243.2,22.1)
SWCLK: length 37
  TOP w0.254: U14.49 v1(232.73,45.27)
  TOP w0.508: v1(243.08,46.23) 252.22,46.23 253.36,45.08 253.36,40.51 252.11,39.26 J10.3 R2.2
  BOTTOM w0.508: v1(232.73,45.27) 233.69,46.23 v1(243.08,46.23)
SWDIO: length 31.2
  TOP w0.254: U14.46 234.78,42.37 v1(235.46,43.05)
  TOP w0.508: R1.2 246.86,41.06 247.06,41.26 J10.2 251.95,41.26 252.32,41.62 252.32,44.36 251.84,44.83 v1(242.32,44.83)
  BOTTOM w0.508: v1(235.46,43.05) 237.24,44.83 v1(242.32,44.83)
T1: length 30.7
  TOP w0.508: R3.1 218.36,20.18 218.72,19.81 223.52,19.81 223.94,20.24 R6.2
  TOP w0.762: J11.2 208.79,10.67 208.79,16.76 211.84,19.81 216.03,19.81 216.49,20.28 C5.2 R3.1
T2: length 27.7
  TOP w0.508: R4.1 218.36,17.13 218.72,16.76 223.52,16.76 223.94,17.19 R7.2
  TOP w0.762: R4.1 C6.2 216.49,17.1 216.19,16.8 211.84,16.8 210.82,15.78 210.82,12.7 J12.1
T3: length 24.3
  TOP w0.508: R8.2 223.94,14.14 223.52,13.72 218.72,13.72 218.36,14.08 R5.1
  TOP w0.762: R5.1 C7.2 216.49,12.62 218.44,10.67 223.01,10.67 J12.3
TXD1: length 29.9
  TOP w0.254: v1(235.45,39.87) 234.94,40.37 U14.42
  TOP w0.508: U12.4 239.39,21.18 240.31,22.1 v1(241.3,22.1)
  BOTTOM w0.508: v1(241.3,22.1) 241.94,22.73 241.94,38.73 240.8,39.87 v1(235.45,39.87)
UHEATL: length 28.6
  TOP w1.016: U11.15 85.09,117.6 83.31,115.82 75.18,115.82 73.64,114.28 RL1.2
UHEATN: length 80.6
  TOP w1.016: RL2.2 73.64,61.96 77.72,66.04 77.72,95 71.12,101.6 71.12,115.32 74.17,118.36 81.28,118.36 82.55,119.63 U11.14
UPUMP: length 155.4
  BOTTOM w1.016: U11.16 91.19,123.19 93.47,125.48 93.47,140.21 95.5,142.24 214.38,142.24 217.42,139.19 217.42,132.81 RL3.2
ZERO: length 78.3
  TOP w0.254: U14.38 v1(231.27,38.37)
  TOP w0.508: R20.1 v1(209.3,41.15)
  BOTTOM w0.508: v1(231.27,38.37) 230.1,38.37 228.73,39.75 210.69,39.75 v1(209.3,41.15)
N931520: length 4.9
  TOP w0.254: C4.2 218.44,41.15 219.21,40.37 U14.7
N946293: length 12.8
  BOTTOM w1.524: U15.4 R11.2 U17.3
N946361: length 5.1
  BOTTOM w1.524: R10.2 U15.6
N946401: length 8
  BOTTOM w2.032: R12.2 C10.2
N946461: length 275.3
  TOP w0.254: R9.1 v1(232.79,52.07)
  TOP w0.508: U15.1 50.8,142.75 54.36,146.3 218.95,146.3 222.5,142.75 222.5,99.06 228.6,92.96 v1(228.6,57.91)
  BOTTOM w0.508: v1(228.6,57.91) 232.79,53.72 v1(232.79,52.07)
N947130: length 30.1
  BOTTOM w1.016: U19.1 147.07,36.83 146.3,36.07 146.3,29.97 147.07,29.21 U19.4 148.59,19.56 150.37,17.78 153.42,17.78 R17.2
N947134: length 16.7
  BOTTOM w1.016: R18.2 151.89,20.32 150.88,21.34 150.88,30.99 150.11,31.75 U19.3 U19.2
N947246: length 15.5
  TOP w0.508: 153.84,36.83 153.84,32.6 154.69,31.75 U19.6 ; 153.84,36.83 U19.8 ; 153.84,36.83 R20.2 R19.2
N947751: length 12.8
  BOTTOM w1.524: U16.4 R15.2 U18.3
N947803: length 5.1
  BOTTOM w1.524: R14.2 U16.6
N947859: length 8
  BOTTOM w2.032: R16.2 C11.2
N947919: length 326
  TOP w0.254: R13.1 v1(230.76,52.07)
  TOP w0.508: v1(227.46,59.18) 227.46,92.58 221.49,98.55 221.49,142.24 218.44,145.29 57.91,145.29 56.39,143.76 56.39,109.73 50.8,104.14 U16.1
  BOTTOM w0.508: v1(230.76,52.07) 230.76,53.72 227.46,57.02 v1(227.46,59.18)

## Copper pours and planes (outline as drawn; the poured copper is in the pictures)
3V3 on TOP (solid shape): 231.14,41.78 229.87,40.51 229.87,37.85 231.14,36.58 231.14,36.07 228.09,36.07 226.95,37.21 225.68,37.21 224.79,36.32 224.79,36.07 224.28,36.07 224.03,36.32 224.03,36.83 225.04,37.85 225.04,39.12 224.03,40.13 224.03,43.05 231.14,43.05
5V on TOP (solid shape): 246.83,11.39 247.01,11.47 247.2,11.39 247.72,10.87 247.01,10.1 246.31,10.87
GND on TOP (solid shape): 235.4,11.39 235.59,11.47 235.77,11.39 236.29,10.87 235.59,10.1 234.88,10.87
GND on BOTTOM: 251.46,55.88 213.36,55.88 210.82,58.42 193.04,58.42 187.96,63.5 162.56,63.5 160.02,60.96 160.02,5.08 162.56,2.54 246.38,2.54 248.92,5.08 248.92,10.16 254,15.24 254,53.34
485A on TOP (solid shape): 240.14,11.16 240.32,11.09 240.4,10.91 240.39,10.16 239.35,10.11 239.39,11.16
485B on TOP (solid shape): 243.2,11.16 243.25,10.11 242.21,10.16 242.2,10.91 242.28,11.09 242.46,11.16
AC220G on BOTTOM (solid shape): 71.63,15.75 71.63,1.02 71.12,0.51 66.04,0.51 65.53,1.02 65.53,15.75 66.04,16.26 71.12,16.26
AC220L on TOP (solid shape): 33.02,76.2 33.02,50.8 22.86,40.64 11.68,40.64 8.64,43.69 8.64,74.68 12.7,78.74 30.48,78.74
AC220L on TOP (solid shape): 33.02,142.24 33.02,106.68 25.4,99.06 5.08,99.06 2.54,101.6 2.54,129.54 5.08,132.08 12.7,132.08 15.24,134.62 15.24,142.24 17.78,144.78 30.48,144.78
AC220L on BOTTOM (solid shape): 33.02,142.24 33.02,106.68 30.48,104.14 30.48,89.92 29.46,88.9 25.4,88.9 22.86,86.36 22.86,81.28 25.4,78.74 30.48,78.74 33.02,76.2 33.02,50.8 30.48,48.26 30.48,40.64 22.86,33.02 22.86,25.4 25.4,22.86 40.64,22.86 43.18,25.4 43.18,43.18 58.42,58.42 58.42,96.52 60.96,99.06 76.71,99.06 77.22,99.57 77.22,108.2 77.72,108.71 79.76,108.71 80.26,108.2 80.26,99.57 80.77,99.06 88.9,99.06 91.44,96.52 91.44,88.9 88.9,86.36 83.82,86.36 76.2,93.98 66.04,93.98 63.5,91.44 63.5,55.88 52.32,44.7 52.32,11.18 51.82,10.67 46.23,10.67 45.72,11.18 45.72,15.24 43.18,17.78 5.08,17.78 2.54,20.32 2.54,129.54 5.08,132.08 12.7,132.08 15.24,134.62 15.24,142.24 17.78,144.78 30.48,144.78
AC220N on BOTTOM (solid shape): 80.26,59.94 80.26,51.31 80.77,50.8 86.36,50.8 91.44,45.72 91.44,43.18 88.9,40.64 86.36,40.64 81.28,45.72 68.58,45.72 61.98,39.12 61.98,24.38 62.48,23.88 105.66,23.88 107.19,22.35 107.19,11.68 106.68,11.18 103.12,11.18 102.62,11.68 102.62,20.32 102.11,20.83 62.48,20.83 61.98,20.32 61.98,3.05 60.45,1.52 16.76,1.52 16.26,2.03 16.26,11.18 16.76,11.68 17.78,11.68 18.29,11.18 18.29,5.59 18.8,5.08 30.99,5.08 31.5,5.59 31.5,11.18 32,11.68 33.02,11.68 33.53,11.18 33.53,5.59 34.04,5.08 54.86,5.08 55.88,6.1 55.88,40.64 66.04,50.8 76.71,50.8 77.22,51.31 77.22,59.94 77.72,60.45 79.76,60.45
HEATL on TOP (solid shape): 73.66,92.96 73.66,87.38 72.64,86.36 66.04,86.36 63.5,83.82 63.5,76.2 66.04,73.66 66.04,48.26 63.5,45.72 63.5,30.48 66.55,27.43 77.72,27.43 80.77,24.38 80.77,11.68 80.26,11.18 75.18,11.18 74.68,11.68 74.68,19.3 73.66,20.32 60.96,20.32 55.88,25.4 55.88,91.44 58.42,93.98 72.64,93.98
HEATN on TOP (solid shape): 92.96,28.96 92.96,11.68 92.46,11.18 85.34,11.18 84.84,11.68 84.84,25.4 73.15,37.08 68.58,37.08 67.56,38.1 67.56,42.16 68.58,43.18 78.74,43.18
3V3 on TOP (solid shape): 235.5,48.06 234.9,47.41 234.82,47.38 234.74,47.41 234.15,48.06 234.82,48.46
3V3 on TOP (solid shape): 235.53,33.98 235.13,33.3 234.48,33.9 234.46,33.98 234.48,34.05 235.13,34.65
3V3 on TOP (solid shape): 219.91,34.04 219.95,33.91 219.91,33.77 219.28,33.23 218.84,33.91 219.28,34.58
5V on TOP (solid shape): 244.16,14.81 244.2,14.67 244.16,14.54 243.5,13.97 243.14,14.67 243.5,15.37
GND on TOP (solid shape): 216.77,33.91 216.33,33.23 215.7,33.77 215.66,33.91 215.7,34.04 216.33,34.58
GND on TOP (solid shape): 239.46,14.67 239.1,13.97 238.44,14.54 238.4,14.67 238.44,14.81 239.1,15.37
485DE on TOP (solid shape): 241.62,20.01 241.66,19.87 241.62,19.74 240.96,19.17 240.6,19.87 240.96,20.57
485DE on TOP (solid shape): 242,19.87 241.64,19.17 240.98,19.74 240.94,19.87 240.98,20.01 241.64,20.57
AT1 on TOP (solid shape): 227.05,21.41 227.08,21.34 227.05,21.26 226.51,20.72 226.11,21.34 226.51,21.95
AT2 on TOP (solid shape): 227.16,18.37 227.19,18.29 227.16,18.21 226.52,17.61 226.11,18.29 226.52,18.96
AT3 on TOP (solid shape): 227.15,15.37 227.19,15.24 227.15,15.11 226.52,14.56 226.08,15.24 226.52,15.92
HEATC on TOP (solid shape): 84.91,131.76 85.09,131.84 85.27,131.76 85.65,131.37 85.09,130.75 84.53,131.37
M3M2 on TOP (solid shape): 217.86,69.94 217.9,69.85 217.86,69.76 217.39,69.29 216.79,69.85 217.39,70.41
PUMP on TOP (solid shape): 87.45,131.76 87.63,131.84 87.81,131.76 88.19,131.37 87.63,130.75 87.07,131.37
PUMP1 on TOP (solid shape): 233.47,48.06 232.87,47.41 232.79,47.38 232.71,47.41 232.12,48.06 232.79,48.46
PUMP2 on TOP (solid shape): 231.37,48.06 230.83,47.52 230.76,47.5 230.69,47.52 230.15,48.06 230.76,48.46
ZERO on TOP (solid shape): 157.05,41.28 157.09,41.15 157.05,41.01 156.41,40.47 155.98,41.15 156.41,41.82
N931520 on TOP (solid shape): 219.12,41.83 218.52,41.19 218.44,41.16 218.36,41.19 217.76,41.83 218.44,42.24
N946461 on TOP (solid shape): 232.71,51.65 232.79,51.68 232.87,51.65 233.47,51 232.79,50.6 232.12,51
N946461 on TOP (solid shape): 50.62,139.28 50.8,139.35 50.98,139.28 51.31,138.94 50.8,138.37 50.29,138.94
N947246 on TOP (solid shape): 152.98,41.28 153.02,41.15 152.98,41.01 152.35,40.47 151.91,41.15 152.35,41.82
N947246 on TOP (solid shape): 153.9,41.15 153.47,40.47 152.83,41.01 152.79,41.15 152.83,41.28 153.47,41.82
N947246 on TOP (solid shape): 156.27,36.83 155.7,36.32 155.36,36.65 155.29,36.83 155.36,37.01 155.7,37.34
N947246 on TOP (solid shape): 156.27,31.75 155.7,31.24 155.36,31.57 155.29,31.75 155.36,31.93 155.7,32.26
N947246 on TOP (solid shape): 154.66,37.01 154.73,36.83 154.66,36.65 154.02,36.01 153.78,36.58 153.78,37.08 154.02,37.65
N947919 on TOP (solid shape): 230.68,51.65 230.76,51.68 230.84,51.65 231.43,51 230.76,50.6 230.08,51
N947919 on TOP (solid shape): 50.62,83.4 50.8,83.47 50.98,83.4 51.31,83.06 50.8,82.49 50.29,83.06

Small or netless copper shapes (teardrops, artwork), in the pictures only: 82 on TOP, 24 on BOTTOM

## Text on the board
Ref Des/Silkscreen Top: T1 | T2 | T3 | L | P1 | N | G | P2 | 220L | 220N | 220G | HL | HN | RED | BLACK | MOTOR | PUMP | 12v | 5v | P- | P+ | A+ | A- | B- | B+ | M2 | M3 | M1
NCLEGEND-1-2: FIGURE | SIZE | 70.9 | 47.2 | 39.4 | 33.5 | 31.5 | 19.7 | 196.9 | 157.5 | 259.8x39.4 | DRILL CHART: TOP to BOTTOM | ALL UNITS ARE IN MILS | PLATED | NON-PLATED | QTY | 32 | 17 | 44 | 26 | 76 | 59 | 47 | 9 | 8 | 3
